# Altium PCB roneMotorBoard-v10.PcbDoc (part 2 of 2)
Units mil, origin at the board's own origin, x right, y up, seen from the top; angles counter-clockwise.
Board outline 3702 x 3936.38 mil, 2 copper layers (Top Layer, Bottom Layer); 100 components, 85 nets, 395 pads, 263 vias.
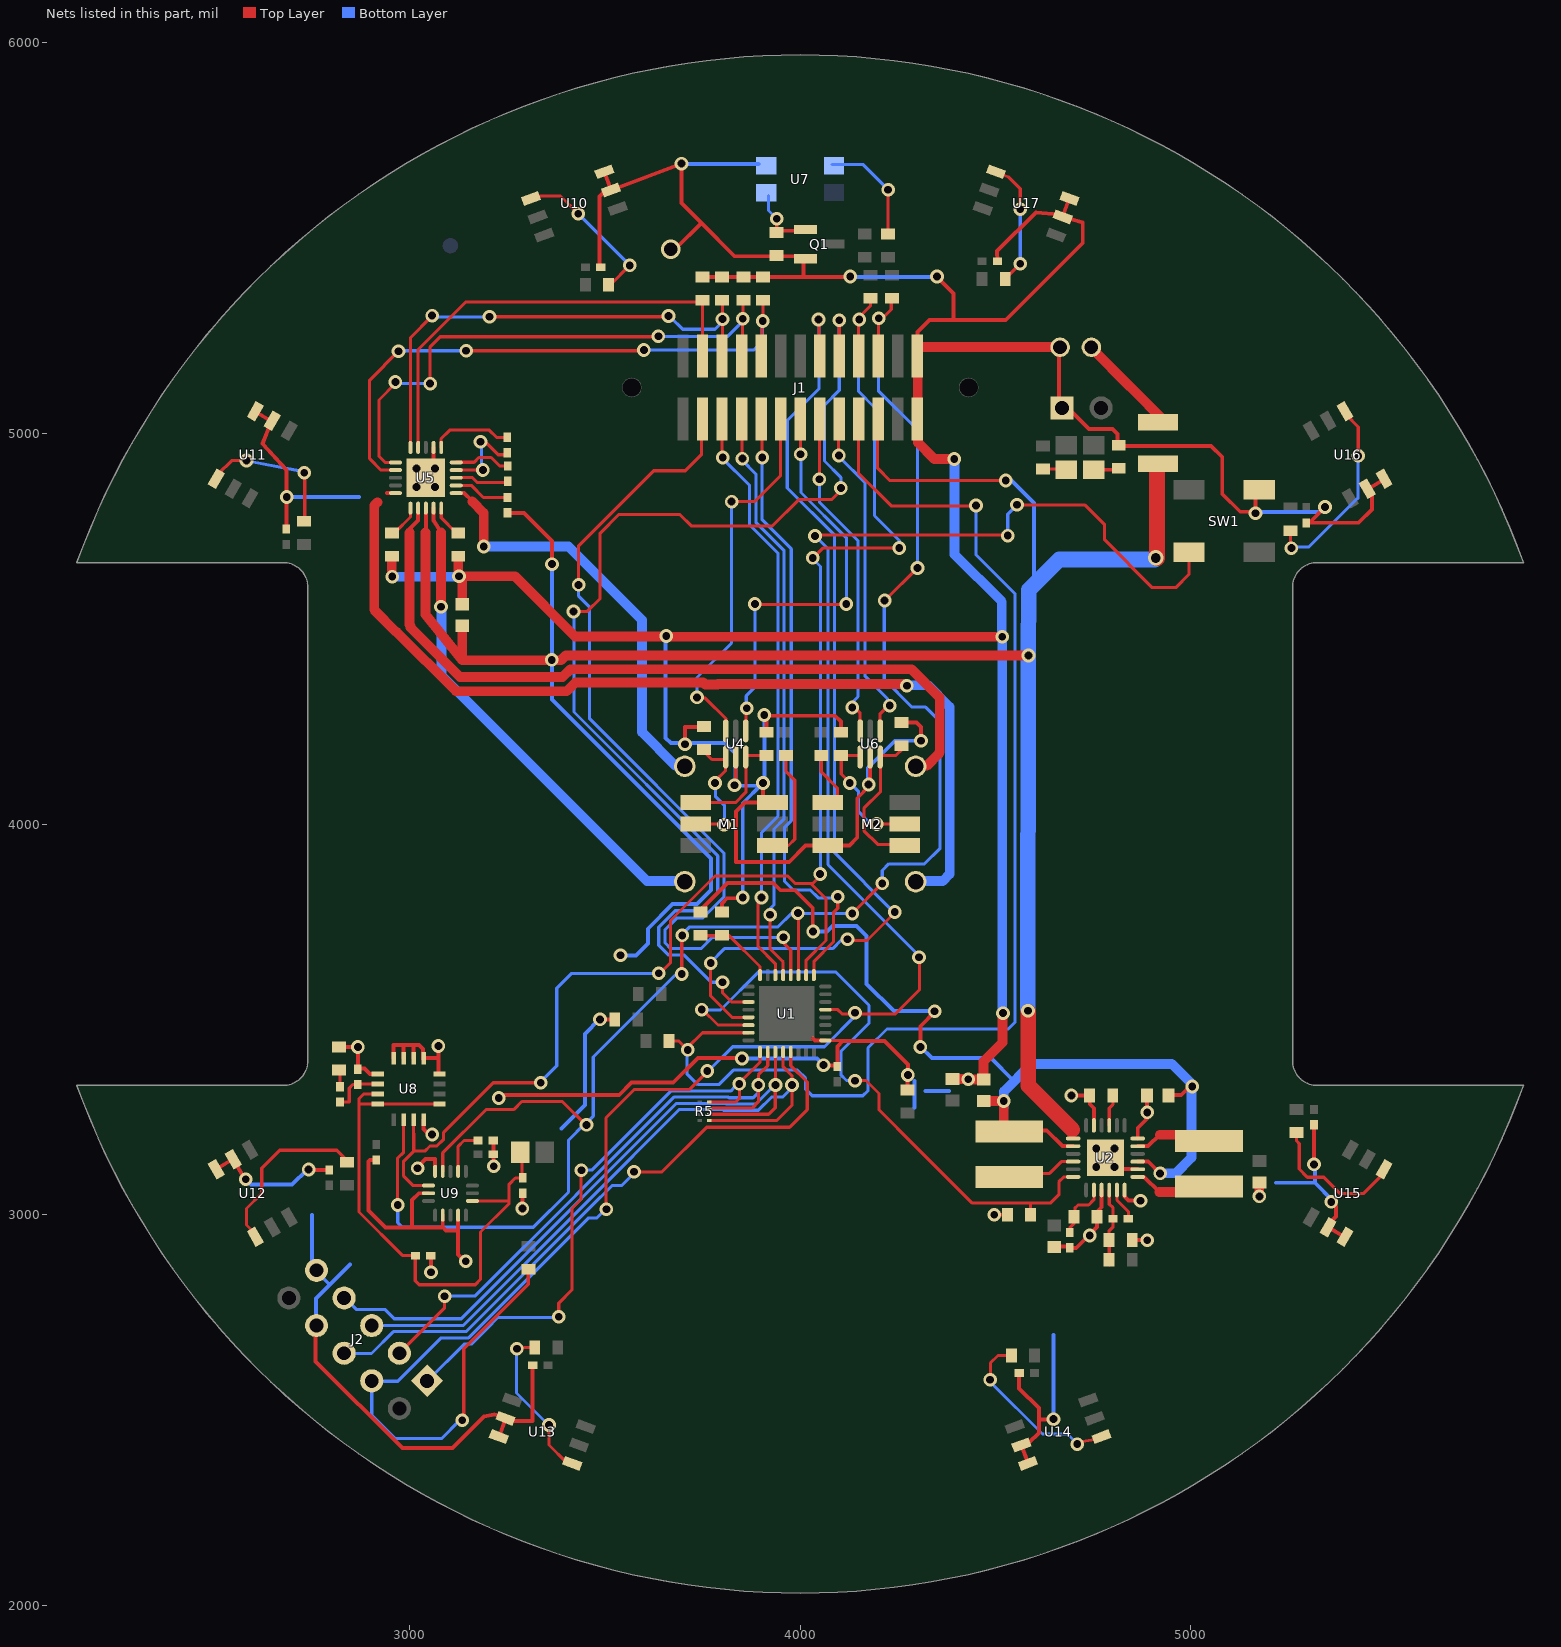
[diagram p2: the nets of this part, all layers, seen from the top]

## Via types
v1: diameter 35, hole 20, Top Layer to Bottom Layer, 233 vias
v2: diameter 25.98, hole 12.99, Top Layer to Bottom Layer, tented top, 9 vias
v3: diameter 35, hole 20, Top Layer to Bottom Layer, tented top, 8 vias
v4: diameter 136, hole 136, Top Layer to Bottom Layer, 4 vias
v5: diameter 96, hole 96, Top Layer to Bottom Layer, 4 vias
v6: diameter 175, hole 175, Top Layer to Bottom Layer, 2 vias
v7: diameter 50, hole 35, Top Layer to Bottom Layer, 1 vias
v8: diameter 40, hole 25, Top Layer to Bottom Layer, 1 vias
v9: diameter 915, hole 915, Top Layer to Bottom Layer, 1 vias

## Nets (pads, with @x,y where several pads share a name; then routed paths per layer and width w, separated by ;. In a path a pad name is that pad's centre, name@x,y a point inside that pad or via, vN(x,y) a via of type N, cw(c..) or ccw(c..) an arc to the next point about the centre after c; other vN are vias at no path point) (continued)
GND: C1.1 C5.1 C6.1 C7.1 C8.1 C9.2 C10.2 C12.1 C13.1 C14.1 C15.1 C16.1 C17.1 C18.1 C19.1 C20.1 C21.2 C23.1 C24.1 C25.1 C26.1 C27.1 J1.25 J1.26 J2.8 J2.9 J3.2 J4.1 M1.K M2.K Q1.2 R6.2 R7.2 R8.2 R9.2 R10.2 R11.2 R12.1 R14.1 R15.2 R17.1 R18.1 R19.1 R21.1 R22.2 R24.2 R26.1 R28.1 R30.1 R39.1 R41.2 SW1.2 U1.1 U2.3 U2.6 U2.8 U2.12 U2.17 U2.25 U4.2 U5.2 U5.21 U6.2 U7.4 U8.4 U8.8 U8.9 U8.10 U8.11 U8.12 U8.13 U9.5 U9.7 U9.10 U9.12 U10.5 U10.6 U11.5 U11.6 U12.5 U12.6 U13.5 U13.6 U14.5 U14.6 U15.5 U15.6 U16.5 U16.6 U17.5 U17.6 | length 18424.4
  Top Layer w8: U1.1@4067.94,3446 4107,3446
  Top Layer w10: U12.6@2505.7,3116.6 2548.38,3142.62 U12.5@2549,3143 ; U12.5@2549,3141.6 2576,3096 v1(2581,3091) ; U11.6@2606,5055 U11.5@2647.91,5030.05 ; U11.5@2643.91,5023.05 2644,5023 2624,4973 2685,4906 v1@2685,4836 ; C14.1@2685,4754.69 v1@2685,4836 ; v1(2686,4837) v1@2685,4836 ; v1(2742,3116) 2739,3116 2738,3115 C15.1@2794,3115 ; J2.8@2760,2715 2760,2625 2982,2403 3110,2403 3191,2484 3217,2489 U13.5@3243,2483 ; R39.1@2819.5,3429.53 v1@2869.03,3429.53 ; C21.2@2868,3372.69 v1@2868,3429 ; C21.2@2868,3374 2885,3374 2898.61,3360.39 U8.13@2919.26,3360.39 ; C23.1@2915,3140.32 2898.68,3140.32 2895,3136.63 2895,3010.87 2938.87,2967 3085,2967 ; U8.12@2959.61,3400.74 2959.61,3434 2985.2,3434 ; U8.11@2985.2,3400.74 2985.2,3434 ; 3007,2968 3007,3038 3024,3055 U9.7@3048.9,3055 ; U8.10@3010.8,3400.74 3010.8,3433.2 ; v1@3022,3123 3041.63,3142.63 3065.63,3142.63 U9.5@3065.63,3111.1 ; U8.9@3035,3399 3035,3424 3025,3434 2985.2,3434 ; U8.4@3036.39,3243.26 3036.39,3219.11 3050,3205.5 v1@3058.5,3205.5 ; U8.9@3036.39,3400.74 3074.5,3400.74 ; v1@3055,2850 v1(3055,2853) C27.1@3055,2895 ; U5.21@3062,4906 U5.2@3062,4964.07 ; U8.8@3074,3360 v1@3074,3428.5 ; 3085.32,2968.68 U9.10@3085.32,2998.9 ; 3086,2968 3094,2960 3124.69,2960 ; U9.12@3124.69,2998.9 3124.69,2960 ; 3125,2960 3124.69,2960 ; v1@3145,2878 3124.69,2898.31 3124.69,2960 ; v1@3214.68,3125.32 C26.1@3214.68,3190 ; v1@3227.5,3297 3237.5,3307 3537,3307 3568,3338 3675,3338 3738,3401 v1@3850,3401 ; U13.6@3231,2434 U13.5@3246.03,2479.2 ; U13.5@3251,2473 3252,2472 3315.32,2472 C16.1@3315.32,2615 ; v1(3289,3016) C24.1@3289,3055 ; v1@3485.5,3500 R30.1@3525.47,3500 ; C13.1@3496,5423 3486,5433 3486,5606 3502.2,5622.2 U10.5@3515.97,5622.2 ; U10.6@3498.87,5669.19 U10.5@3516,5623 ; U10.5@3526,5626 v1(3696,5690) 3696,5589 3747,5538 ; v7@3660,5472 3681,5472 3747,5538 ; v1(3705,4204) 3705,4248 R17.1@3749.47,4248 ; R6.2@3747,5399.53 R6.2@3750,5399.53 R7.2@3800,5399.53 R8.2@3855,5399.53 R9.2@3905,5399.53 4008,5399.53 Q1.2@4008,5441 ; R28.1@3800,3774.53 3800,3797 3813,3810 3841,3810 v1@3853,3822 ; v1@3835,4100 U4.2@3835,4171.54 U4.2@3835,4174.54 ; M1.K@3905,4055 M1.K@3905,4055.12 ; v1(3905,4105) M1.K@3905,4055.12 ; M1.K@3905.16,4055.12 M1.K@3905,4055.12 ; R15.2@3914,4235 v1@3914,4275 ; v1@3917.5,4277 4089,4277 4104,4262 R14.1@4104,4234.53 ; R41.2@3939,5454.47 3940.47,5453 3987,5453 Q1.2@3996,5444 ; R41.2@3940,5453 3832,5453 3747,5538 ; 4008.03,5399.5 v1@4128,5399.5 ; 4033.12,3450.88 4037.9,3446.1 U1.1@4064.43,3446.1 ; v1(4059.5,3383) 4059.5,3390.5 v1@4067,3383 ; v1@4070,3386 4073.5,3382.5 4095,3382.5 4095,3431 4108,3444 ; M2.K@4094.84,3944.88 4125.88,3944.88 4146,3965 4146,4066 v1@4176.5,4096.5 ; M2.K@4096,3945 4014,3945 3972,3903 3836,3903 3836,4031.96 3859.16,4055.12 M1.K@3905,4055.12 ; 4107,3445 4108,3444 ; v1@4179,4101 U6.2@4179,4171.54 ; R12.1@4259,4259.53 4297.47,4259.53 4309,4248 v1(4309,4213) ; R18.1@4275,3319.53 v1@4275,3353 ; v1@4276,3358 4276,3385 4216,3445 4108,3445 4108,3444 ; J1.26@4300,5239 4300,5259 4331,5290 4392,5290 ; v1@4350,5400 4392,5358 4392,5290 ; v1@4427.5,3345 4427.5,3347.56 v1@4427.5,3349.5 ; v1(4496.5,3000) R19.1@4530.47,3000 ; C20.1@4504.69,5440 4504,5466 4603,5565 U17.5@4663,5560 ; C17.1@4560.31,2595 4560.31,2555.68 4611,2505 4611,2476 ; U14.5@4566.03,2410.8 4580.47,2371.44 4581,2370 U14.6@4580,2368 ; U14.5@4573,2417 4586,2417 4611,2442 4611,2476 ; C10.2@4640,2918.44 C7.1@4690,2918.44 ; v1(4648,2477) 4647,2476 4611,2476 ; J3.2@4662,5220 4662,5088 4739,5011 4799,5011 4812,4998 R26.1@4812,4976 ; U17.6@4687,5599 U17.5@4671.97,5553.8 4723,5539 4723,5487 4526,5290 4392,5290 ; C7.1@4690,2917.6 C7.1@4690,2915.32 4706.31,2915.32 4760,2969 R21.1@4760,2988 ; v1@4697,3305 R22.2@4740.47,3305 ; R22.2@4741,3292 4741,3283 4751.47,3272.53 U2.17@4751.47,3228.68 ; U2.25@4751.47,3175.69 U2.25@4781,3146.16 ; R21.1@4759,3007 4771.16,3019.16 U2.3@4771.16,3063.32 ; U2.25@4771.16,3136.32 U2.25@4781,3146.16 ; U2.25@4810.53,3107.47 U2.25@4810.53,3116.63 ; R26.1@4815,4967.53 5051.47,4967.53 5080,4939 5080,4845 5126,4799 5165,4799 SW1.2@5165,4846 ; U2.6@4830.21,3046.79 4840.21,3036.79 v1@4871,3036.79 ; R24.2@4849.53,2935 4889,2935 v1(4888,2935) ; U2.8@4863.68,3116.63 U2.25@4810.53,3116.63 ; U2.12@4863.68,3195.37 4863.68,3221.68 4888,3246 v1@4884,3250 ; v1@4887.44,3261.56 C9.2@4887.44,3315 ; C19.1@5295,4771 5429,4771 5463,4805 5463,4847 U16.5@5460,4850 ; C19.1@5303,4771 v1(5343,4811) ; v1(5315,3129) C18.1@5315,3230.32 ; U15.5@5351,2968.4 U15.6@5394,2943 ; U15.5@5358,2983 5371,2996 5371,3021 v1@5362.5,3029.5 ; v1(5359,3033) v1@5362.5,3029.5 ; v1@5362,3029 v1@5362.5,3029.5 ; v1@5363,3030 v1@5362.5,3029.5 ; U16.5@5454,4858 U16.6@5493,4881 ; U2.25@4781,3146.16 U2.25@4810.53,3116.63
  Top Layer w25: v1@2955,4634 R10.2@2955,4685.47 ; v1@3125,4637 R11.2@3125,4685.47 ; v1@3127.5,4634.5 3128,4634 3270,4634 3424,4480 3657,4479.79 v1(4517,4479) ; C5.1@3135,4562.56 v1@3135,4625 ; J1.26@4301,5193 4301,4976 4343,4934 v1@4393,4934 ; J1.26@4302,5222 4303,5221 J3.2@4653,5221 ; C6.1@4390,3347.56 4427.5,3347.56 v1@4429.56,3347.56 ; v1@4429.94,3346.06 C8.1@4469,3346.06 ; C8.1@4469,3345.5 C8.1@4469,3346.06 ; C8.1@4469.5,3346.06 C8.1@4469,3346.06 ; v1@4518,3516 4518,3441 4469,3392 C8.1@4469,3346.06 ; v1(5175,3047) C12.1@5175,3082.44
  Bottom Layer w10: v1(2581,3091) 2595,3077 2700,3077 2739,3116 v1(2742,3116) ; v1(2686,4837) 2871,4837 ; 2751,3000 2751,2866 2796,2821 ; J2.8@2761,2718 2761,2786 2847.5,2872.5 ; 3389,3221 3449,3281 3449,3463 v1@3486.5,3500.5 ; v1@3655.47,4480.47 3655.47,4220.53 3669,4207 3807,4207 3834,4180 v1@3834,4098 ; v1@3698,5689 U7.4@3894,5689 ; v1@3835,4098 v1@3896,4098 ; v1(3851,3400) 4042.5,3400 v1(4059.5,3383) v1@4059.5,3390.5 ; v1@3853,3822 3853,4053 v1@3902.5,4102.5 ; v1@3909,4103 v1@3909,4272 ; v1@4128,5400 v1@4350,5400 ; v1@4174,4101 4174,4144 4243,4213 v1(4309,4213) ; 4292,3274 4292,3343 ; 4320,3317 4381,3317 ; v1(4648,2477) 4648,2692 ; v1@5163,4798 5330,4798 v1(5343,4811) ; 5217,3082 5317,3082 ; v1@5317,3128 5317,3082 ; v1@5362.5,3036.5 5317,3082
  Bottom Layer w25: v1(2956,4633) v1@3127,4633 ; v1@4395,4929 4395,4690 4516,4569 v1@4516,4482 ; v1@4517,3520 v1(4517,4479)
  other v1: 3144,2881 4741,2947 4871,3036 3021,3119 3216,3124 3058,3205.5 4888,3262 3228.5,3299 4694,3305 4430,3347 4275.5,3357.5 2868,3429.5 3074,3432 3487.5,3500 4519,3516 3853,3812 3832,4099 4175,4101 3908,4279 3657,4481 3127,4634 5165,4795 4394,4934 4128,5401 4350,5401
  other v3: 4757.38,3122.38 4804.62,3122.38 4757.38,3169.62 4804.62,3169.62 3018.38,4862.38 3065.62,4862.38 3018.38,4909.62 3065.62,4909.62
  other v7: 3669,5471
I2C_SCL: J1.22 R1.1 U1.11 U8.2 U9.4 | length 4604.7
  Top Layer w8: v1@2969,3027 2969,3144 2985,3160 ; 2985.2,3160 U8.2@2985.2,3243.26 ; U9.4@3085.32,3111.1 3085.32,3158.44 3195.87,3269 3266.72,3269 3287.72,3290 3391,3290 v1@3451,3230 ; v1@3697,3619 v1@3697,3717 ; U1.11@3995.53,3613.43 v1@3995.53,3771 ; v1(4133,3771) v1(4210,3848) ; J1.22@4200,5197.02 4200,5291 4204,5295 4211.28,5295 4233,5316.72 4233,5334 R1.1@4236,5337 ; v1@4215.5,4570.5 v1@4301,4656
  Bottom Layer w8: v1(2970,3025) 2970,2980 2982,2968 3317,2968 3407,3058 3407,3191 v1@3449,3233 ; v1@3452.5,3234.5 3470.31,3252.31 3470.31,3403.81 3681,3614.5 3685,3614.5 v1@3691.5,3608 ; v1@3697,3717 3716,3736 3942,3736 3978,3772 3992,3772 v1@3994,3770 ; v1@3994,3771 v1(4133,3771) ; v1@4200,5290 4200,5108.5 4300,5008.5 v1@4300,4666 ; v1(4210,3848) 4210,3881 4227,3898 4318,3898 4358,3938 4358,4262 4321,4299 4286,4299 4215,4370 v1@4215,4569
  other v1: 3453,3230 3697,3616 3698,3715 3994,3772 4216,4572 4300,4655 4201,5294
I2C_SDA: J1.20 R2.1 U1.10 U8.3 U9.6 | length 3868.5
  Top Layer w8: 3010.8,3206.8 U8.3@3010.8,3243.26 ; 3011,3180 3011,3163 ; 3011,3181 3011,3208 ; U9.6@3048.9,3074.69 3009.31,3074.69 2985,3099 2985,3137 3011,3163 ; v1(3336,3338) 3214.5,3338 3087.5,3211 3087.5,3193.28 3070.22,3176 3052.5,3176 3039.5,3163 3011,3163 ; v1@3639.5,3616.5 3668,3645 3668,3753 3782,3867 3968.28,3867 3987.78,3847.5 4027.5,3847.5 ; U1.10@4015.21,3613.43 4015.21,3651.21 4066,3702 4066,3809 4027.5,3847.5 ; v1@4032,4680 4058,4706 v1@4254,4706 ; v1@4051,3867 4031.5,3847.5 4027.5,3847.5 ; J1.20@4149,5196.02 v1@4149,5294 ; v1@4150,5296 4180,5326 R2.1@4180,5342
  Bottom Layer w8: v1@3335,3339 3355.5,3359.5 ; 3355.5,3359.54 3377,3381.04 3377,3580 3414,3617 v1@3638,3617 ; v1@4032,4679 4052,4659 v1@4052,3870 ; v1@4149,5287 4149,5107 4190,5066 4190,4789 4254,4725 v1@4254,4706
  other v1: 3638,3618 4051,3872 4032,4681 4253.5,4706.5 4151,5291
JTAG_BOTTOM_TCK: J2.1 R5.4 U1.25 | length 1513.3
  Top Layer w8: v1(3382,2739) 3382,2774 3416,2808 3416,3016 3439,3039 v1@3439,3116 ; R5.4@3766.81,3288.62 3835.62,3288.62 3845,3299 v1@3845,3332 ; v1@3845.5,3338.5 3897.1,3390.1 U1.25@3897.1,3416.57
  Bottom Layer w8: J2.1@3047,2576 3140,2669 3159,2669 3198.13,2708.13 3198.13,2708.63 3226.5,2737 v1@3381,2737 ; v1@3442,3115 3468.12,3115 3670.12,3317 3823,3317 3837,3335 v1@3846,3335
  other v1: 3440,3114 3844,3335
JTAG_BOTTOM_TDI: J2.7 R5.2 U1.27 | length 1692.6
  Top Layer w8: R5.2@3766.81,3257.13 3919.13,3257.13 3936,3274 v1@3936,3332 ; v1@3936.47,3329.47 U1.27@3936.47,3416.57
  Bottom Layer w8: J2.7@2837,2785 2864.05,2757.95 2937.05,2757.95 2961,2734 3132.63,2734 3441.25,3042.63 3441.25,3042.88 3683.37,3285 3809.09,3285 3810.7,3283.39 3886.11,3283.39 3934.72,3332 v1(3937,3332) v1@3937,3333
JTAG_BOTTOM_TDO: J2.5 R5.1 U1.28 | length 1709.6
  Top Layer w8: R5.1@3766.81,3241.38 3940.38,3241.38 3979,3280 3979,3356 3956.16,3378.84 U1.28@3956.16,3416.57
  Bottom Layer w8: J2.5@2904,2717 3138.25,2717 3457.25,3036 3457.25,3036.25 3690,3269 3802.46,3269 3804.07,3267.39 3892.73,3267.39 3926.85,3301.5 3955.63,3301.5 3979,3324.87 v1(3979,3332)
JTAG_BOTTOM_TEST: J2.6 U1.29 | length 1614.6
  Top Layer w8: v1@3570,3109.5 3646,3109.5 3760.5,3224 3973,3224 4018,3269 4018,3339.63 3975.84,3381.78 U1.29@3975.84,3416.57
  Bottom Layer w8: J2.6@2834,2645 2903,2645 2959,2701 3144.88,2701 3462.88,3019 3463,3019 3519,3075 3543.5,3075 3574.5,3106 v1(3574.5,3110)
JTAG_BOTTOM_TMS: J2.3 R5.3 U1.26 | length 1505.7
  Top Layer w8: J2.3@2974,2646 3090,2762 v1(3090,2791.5) ; R5.3@3766.81,3272.87 3876.87,3272.87 3893,3289 3893,3313 ; v1(3893,3332) 3893,3313 ; U1.26@3916.79,3416.57 3916.79,3381.79 3893,3358 3893,3313
  Bottom Layer w8: v1@3088.5,2793 v1(3090,2791.5) 3090,2791.86 3090.57,2792.43 3168.43,2792.43 3425.25,3049.25 3425.25,3049.51 3676.75,3301 3815.71,3301 3817.33,3299.39 3879.39,3299.39 3893,3313
LED_IR_BEACON: J1.16 U1.21 | length 2493.1
  Top Layer w8: v1@3770,3644 3770,3561 3826,3505 U1.21@3865,3505 ; J1.16@4048,5197.02 v1@4048,5288 ; v1@4110,3702 4171,3702 v1@4242.5,3773.5
  Bottom Layer w8: v1@3772,3647 3806,3681 4083,3681 4104,3702 v1@4122,3702 ; v1@4048,5290 4048,5113.5 3967,5032.5 3967,4860 4088,4739 4088,3926 4241,3773 v1@4241,3771
  other v1: 3771,3644 4121,3705 4242,3775 4047,5291
MOT0_CUR: R11.1 U5.15 | length 77.7
  Top Layer w8: U5.15@3081.37,4808.24 3081.37,4783.37 R11.1@3118.74,4746
MOT0_PWMA: J1.4 R6.1 U5.4 | length 1165.6
  Top Layer w8: U5.4@3022.32,4963.76 3022.32,5214.31 3144,5336 R6.1@3746,5336 ; J1.4@3750,5197.02 R6.1@3750,5338
MOT0_PWMB: J1.6 R7.1 U5.5 | length 1263
  Top Layer w8: U5.5@3002.63,4963.76 3002.63,5022.37 ; 3003,5022 3003,5245 v1@3056,5298 ; v1(3205,5298) v1@3665,5298 ; J1.6@3801,5197.02 R7.1@3801,5341
  Bottom Layer w8: v1@3056,5297 v1@3204,5297 ; v1@3667.5,5297.5 3699,5266 3782,5266 v1@3801,5285
  other v1: 3801,5292 3663,5300 3058,5301
MOT1_A: M2.M2 U5.10 | length 2422.6
  Top Layer w10: 2941.94,4846.94 U5.10@2963.56,4846.94
  Top Layer w25: 2918.5,4823.5 2910,4815 2910,4548 2966.15,4491.85 2967,4491.85 3118.85,4340 3402.67,4340 3424.67,4362 3751.74,4362 3756.74,4357 3788.26,4357 3789.26,4358 v1@4270,4358
  Bottom Layer w25: v1@4275,4355 4327,4355 4382.5,4299.5 4382.5,3871.5 4365,3854 M2.M2@4284,3854
  other v1: 4273,4354
MOT1_B: M2.M1 U5.12 | length 1975.9
  Top Layer w10: 3001,4746 3001,4756 3022,4777 U5.12@3022,4807.24
  Top Layer w25: 3001,4746 3000,4745 3000,4510 3002.93,4507.07 3002.93,4502.59 3129.52,4376 3392,4376 3412,4396 4285,4396 4357,4324 4357,4184 4355,4182 4355,4180 4324,4149 4302,4149 M2.M1@4298,4153
MOT1_CUR: R10.1 U5.11 | length 78.8
  Top Layer w8: R10.1@2965.03,4745 2965.03,4748.03 3002.63,4785.63 U5.11@3002.63,4808.24
MOT1_PWMA: J1.8 R8.1 U5.6 | length 1408.4
  Top Layer w8: U5.6@2964.24,4925.37 2937.63,4925.37 2922,4941 2922,5085 v1@2964.5,5127.5 ; v1(3053,5127) 3053,5221 3079,5247 v1@3637,5247 ; J1.8@3852,5201.02 v1@3852,5292 ; v1@3854,5289 R8.1@3854,5342
  Bottom Layer w8: v1@2964,5127 v1(3053,5127) ; v1(3637,5248) 3815,5248 v1@3854.5,5287.5
  other v1: 2964,5131 3853,5293
MOT1_PWMB: J1.10 R9.1 U5.7 | length 1520
  Top Layer w8: U5.7@2964.24,4905.69 2927.32,4905.69 2898,4935 2898,5136 v1@2973,5211 ; v1(3145,5211) v1@3601,5211 ; J1.10@3902,5203.02 v1@3902,5284 ; v1@3905,5280 R9.1@3905,5342.47
  Bottom Layer w8: v1@2975,5211 v1(3145,5211) ; v1(3600,5213) 3881,5213 3903,5235 v1@3903,5288
  other v1: 2972,5210 3904,5287
MOT_0A: M1.M2 U5.16 | length 1089.5
  Top Layer w10: U5.16@3119.07,4846.94 3140.06,4846.94 3161,4826
  Top Layer w25: 3161,4826 3161,4825 3190,4796 v1(3190,4710)
  Bottom Layer w25: v1(3190,4710) 3406.74,4710 3595,4521.74 3595,4235 3680,4150 M1.M2@3701,4150
MOT_0B: M1.M1 U5.14 | length 1277.1
  Top Layer w10: U5.14@3062,4808.56 3062,4776 3081,4746
  Top Layer w25: v1(3081,4556) 3081,4746
  Bottom Layer w25: v1@3082,4557 3082,4380 3608,3854 M1.M1@3706.19,3854
NetC2_1: C2.1 U5.19 | length 218.5
  Top Layer w8: U5.19@3119.07,4906 v1@3185,4906 ; v1@3181,4974 3198,4974 3227,4945 3251.69,4945 C2.1@3253,4946.31
  Bottom Layer w8: v1@3184,4907 v1@3184,4975
  other v1: 3188,4906 3182,4978
NetC2_2: C2.2 U5.1 | length 211.4
  Top Layer w8: U5.1@3080.68,4964.07 3080.68,4985.68 3103,5008 3204.25,5008 3223.25,4989 3248.69,4989 C2.2@3252,4985.69
NetC3_1: C3.1 U5.18 | length 138.2
  Top Layer w8: U5.18@3119.07,4886.31 3161.31,4886.31 3173.63,4874 3248.06,4874 C3.1@3251,4876.94
NetC3_2: C3.2 U5.20 | length 146.3
  Top Layer w8: U5.20@3119.07,4925.68 3165.43,4925.68 3177.75,4938 3209,4938 3230.69,4916.31 C3.2@3251.31,4916.31
NetC4_2: C4.2 U5.17 | length 144.7
  Top Layer w8: U5.17@3119.07,4866.63 3158.37,4866.63 3189.31,4835.69 C4.2@3251,4835.69
NetC7_2: C7.2 R21.2 U2.2 | length 143.4
  Top Layer w8: C7.2@4690,2954.69 4690,2967 4700,2977 R21.2@4700,2994 ; R21.2@4700.47,2995 R21.2@4701.17,2995 ; R21.2@4703,3000 4703,3017 4711,3025 4738,3025 4751.47,3038.47 U2.2@4751.47,3063.32
NetC11_1: C11.1 R23.2 R24.1 U2.4 | length 205.2
  Top Layer w8: R24.1@4790,2941 4790,2958 4800,2968 4800,3019 4791,3027 U2.4@4791,3056 ; U2.4@4790.84,3063.48 4791,3063.32 U2.4@4791,3048.99 ; R23.2@4791,2871 4791,2937 R24.1@4792,2938
NetC11_2: C11.2 U2.5 | length 80.5
  Top Layer w8: U2.5@4810.53,3063.32 4810.53,3037.47 4840,3008 C11.2@4840,2995
NetC22_2: C22.2 R39.2 | length 42.3
  Top Layer w8: C22.2@2822.5,3327.69 R39.2@2822.5,3370
NetC26_2: C26.2 U9.2 | length 121.5
  Top Layer w8: U9.2@3124.69,3111.1 3124.69,3175.19 3139.5,3190 C26.2@3176,3190
NetD1_2: D1.2 R20.2 | length 50.5
  Top Layer w8: R20.2@4621,4908.47 D1.2@4671.53,4908.47
NetD2_2: D2.2 R26.2 | length 60.5
  Top Layer w8: D2.2@4751,4906.5 R26.2@4811.5,4906.5
NetJ3_1: J3.1 R25.2 | length 267.1
  Top Layer w25: J3.1@4745,5218 4844,5119 ; 4845.15,5118 R25.2@4935,5028.15
NetL1_1: L1.1 U2.22 | length 188
  Top Layer w8: L1.1@4521,3097.75 4529.25,3106 4638.37,3106 4668.37,3136 U2.22@4693.11,3136
NetL2_1: L2.1 U2.7 | length 211.7
  Top Layer w10: U2.7@4863.68,3096.94 4880.06,3096.94 4919,3058 ; L2.1@5031.09,3058 L2.1@5051,3077.91
  Top Layer w25: 4919,3058 L2.1@5031.09,3058
NetL2_2: L2.2 U2.11 | length 158.2
  Top Layer w10: U2.11@4863.68,3175.53 4890,3175.53 ; 4890,3176 4920.91,3205 ; L2.2@5039.41,3206 L2.2@5051,3194.41
  Top Layer w25: 4920.91,3205 L2.2@4994,3205
NetM1_A: M1.A R16.1 | length 310.2
  Top Layer w8: M1.A@3906,3945 3970,3945 3986,3961 3986,4112 3964,4134 R16.1@3964,4175.47
NetM2_A: M2.A R13.1 | length 137
  Top Layer w8: 4054,4133 R13.1@4054,4175.47 ; 4055,4132 4095,4092 M2.A@4095,4054
NetQ1_1: Q1.1 R41.1 U7.3 | length 179.7
  Top Layer w8: R41.1@3940,5512 v1(3940,5549) ; R41.1@3940,5518 4010.17,5518 Q1.1@4013.57,5521.4
  Bottom Layer w8: U7.3@3919,5608 3919,5570 v1(3940,5549)
NetR22_1: R22.1 U2.15 | length 83.8
  Top Layer w8: U2.15@4790.84,3228.83 4790.84,3265.84 4790.84,3272.84 4800,3282 4800,3306 R22.1@4802,3308
NetR31_1: R31.1 U10.1 | length 384.5
  Top Layer w8: U10.1@3323,5607 3386.47,5607 v1(3432,5561.47) ; R31.1@3514.53,5380 v1(3564,5429.47)
  Bottom Layer w8: v1(3432,5561.47) v1(3564,5429.47)
NetR32_1: R32.1 U11.1 | length 381.1
  Top Layer w8: U11.1@2511,4896 2545,4930 v1(2583,4930) ; R32.1@2726.03,4778.5 2732,4772.53 v1@2732,4901
  Bottom Layer w8: v1@2580,4935 2579,4935 2579.96,4934.82 2585.78,4929.09 v1@2731.07,4901.37
  other v1: 2731,4899
NetR33_1: R33.1 U12.1 | length 446.8
  Top Layer w8: U12.1@2604,2953 2583,2974 2583,3016 2622,3055 2622,3119 2668,3165 2814,3165 2819,3160 ; 2818,3161 R33.1@2845,3134.53
NetR34_1: R34.1 U13.1 | length 410.6
  Top Layer w8: v1@3275,2651 3284,2660 R34.1@3320.47,2660 ; R34.1@3320,2660 R34.1@3320.47,2660 ; R34.1@3325,2660 R34.1@3320.47,2660 ; v1(3357,2462) 3357,2411 3401,2367 U13.1@3417,2367
  Bottom Layer w8: v1@3277,2653 3274,2650 3274,2544 3356,2462 v1@3356,2461
  other v1: 3275,2657
NetR35_1: R35.1 U14.1 | length 461.9
  Top Layer w8: v1@4487,2586 4487,2621 4506,2640 R35.1@4540.47,2640 ; v1@4710,2413 4714.01,2418.46 U14.1@4770,2427
  Bottom Layer w8: v1@4487,2585 4487,2571 4620,2439 4684,2439 v1@4710,2413
  other v1: 4709,2413 4486,2578
NetR36_1: R36.1 U15.1 | length 371.8
  Top Layer w8: R36.1@5278,3202.47 R36.1@5270,3210.47 5270,3189 5277,3182 5277,3117 5298,3096 5340,3096 5382,3054 5441,3054 5487,3100 U15.1@5487,3109
NetR37_1: R37.1 U16.1 | length 492.4
  Top Layer w8: v1@5255,4708 R37.1@5255,4752.47 ; U16.1@5397,5047 5428,5016 v1(5428,4942)
  Bottom Layer w8: v1@5256,4709 5301.47,4709 5426,4833.53 ; 5427,4833.53 v1@5427,4942
  other v1: 5257,4706
NetR38_1: R38.1 U17.1 | length 318
  Top Layer w8: U17.1@4503,5668 4534,5655 4563,5626 v1(4563,5573) ; R38.1@4524.53,5395 v1(4563,5433.47)
  Bottom Layer w8: v1@4563,5437 v1(4563,5573)
NetR40_2: R40.2 U7.1 | length 282.9
  Top Layer w8: R40.2@4225,5511 v1(4225,5623)
  Bottom Layer w8: U7.1@4081,5688 4160,5688 v1(4225,5623)
PLLFILT: C21.1 C22.1 U8.14 | length 136.1
  Top Layer w8: C22.1@2823,3288.5 2846,3288.5 2846,3324 2855.32,3333.32 C21.1@2868,3333.32 ; C21.1@2867.5,3334.8 U8.14@2919.26,3334.8
POWER_BUTTON: J1.19 R3.1 U1.23 | length 3139.4
  Top Layer w8: R3.1@3664.53,3445 3688.5,3445 v1@3711.5,3422 ; v1@3710,3426 3749.79,3465.79 U1.23@3867.57,3465.79 ; J1.19@4149,4996 4149,4898 4233,4814 v1@4450,4814
  Bottom Layer w8: v1@3710,3421 3710,3361 3738,3333 3792,3333 3829,3370 3993,3370 4014,3349 4014,3321 4030.5,3304.5 4160.5,3304.5 4173.5,3317.5 4173.5,3427 4222,3475.5 4236.37,3475.5 4236.87,3475 4402.63,3475 4403.13,3475.5 4532.5,3475.5 4549.5,3492.5 4549.5,4589.5 4450,4689 v1@4450,4814
  other v1: 3712,3422 4450,4815
POWER_EN: R19.2 U1.22 U2.24 | length 1673.3
  Top Layer w8: v1@3750,3525 3789.53,3485.47 U1.22@3867.57,3485.47 ; v1@4140,3343.5 4168.5,3343.5 4201.5,3310.5 4201.5,3268.5 4293.5,3176.5 4293.5,3176.37 4439.37,3030.5 4641.13,3030.5 4662,3051.37 4662,3084.31 4674.47,3096.79 U2.24@4698.32,3096.79 ; R19.2@4589.53,3000 4589.53,3030.47
  Bottom Layer w8: v1@3752,3524 3796,3524 3893.5,3621.5 4090.22,3621.5 4176,3535.72 4176,3490 4104,3418 4104,3358 4118.5,3343.5 v1@4140,3343.5
  other v1: 4140,3343 3748,3525
QEI_0A: J1.11 U4.6 | length 936.9
  Top Layer w8: v1@3737,4322 3757,4322 3810.41,4268.59 U4.6@3810.41,4241.46 ; v1(3824.5,4825) 3883,4825 3950,4892 J1.11@3950,5013
  Bottom Layer w8: v1(3736,4324) 3736,4375 3824,4463 3824,4780 ; 3824,4777.5 v1@3824,4825
QEI_0A_ANALOG: M1.E1 R17.2 U4.1 | length 335.5
  Top Layer w8: M1.E1@3708.31,4000 v1@3804,4000 ; R17.2@3759,4180 3774,4165 3809,4165 3809,4136 3783,4111 v1@3783,4097
  Bottom Layer w8: v1@3783,4099 3783,4071 3806,4048 v1@3806,4004
  other v1: 3805,3998 3782,4105
QEI_0B: J1.13 U4.4 | length 1103.1
  Top Layer w8: U4.4@3861.59,4241.46 v1@3861.59,4308.41 ; v1@3884,4562 v1@4119,4562 ; v1@4001,4942 J1.13@4001,5031
  Bottom Layer w8: v1@3861,4291 v1@3861,4308 ; v1@3862,4300 3862,4328 3884,4350 v1@3884,4562 ; v1@4002,4941 4002,4848.37 4118,4732.37 v1@4118,4565
  other v1: 3863,4296 3884,4563 4118,4563 4001,4946
QEI_0B_ANALOG: M1.E2 R15.1 U4.3 | length 323.7
  Top Layer w8: M1.E2@3710,4055 3835,4055 3861,4081 3861,4186.13 U4.3@3857.59,4189.54 ; U4.3@3862,4175.47 R15.1@3914,4175.47
QEI_1A: J1.15 U6.6 | length 865.2
  Top Layer w8: v1@4049,4881 J1.15@4049,5048 ; v1@4133,4304 4153.41,4283.59 U6.6@4153.41,4238.46
  Bottom Layer w8: v1@4049,4880 4049,4824 4148,4725 4148,4326 4133,4311 v1@4133,4303
  other v1: 4133,4298 4049,4882
QEI_1A_ANALOG: M2.E1 R14.2 U6.1 | length 359.2
  Top Layer w8: R14.2@4104,4175.47 U6.1@4152.53,4175.47 ; R14.2@4105,4173 4105,4128 v1@4126,4107 ; v1@4207,4000 M2.E1@4285,4000
  Bottom Layer w8: v1@4122,4105 v1(4127,4105) 4149.41,4082.59 4149.41,4031.59 4180,4001 v1@4207,4001
  other v1: 4196,4000
QEI_1B: J1.17 U6.4 | length 904.6
  Top Layer w8: v1@4098,4951 J1.17@4098,5038 ; U6.4@4204.59,4238.46 4204.59,4282.59 v1@4225,4303 ; v1@4225,4303 4232,4310 4232,4313 4225,4306 v1@4225,4303
  Bottom Layer w8: v1@4100,4939 4166,4873 4166,4378 4223,4321 v1@4223,4298 ; v1@4220,4313 v1@4234,4313 ; v1@4225,4303 4225,4306 v1@4232,4313
  other v1: 4229,4303 4099,4943
QEI_1B_ANALOG: M2.E2 R12.2 U6.3 | length 426.3
  Top Layer w8: U6.3@4204,4175.47 4244.47,4175.47 R12.2@4262,4193 ; U6.3@4205,4182.13 4205,4082 4163,4040 4163,3983 4198,3948 M2.E2@4293,3948
RESET: J1.18 U1.19 | length 2906.6
  Top Layer w8: v1(3420,4544) 3455,4544 3488,4577 3488,4744.37 3535.63,4792 3692,4792 3721,4763 3929,4763 3996,4830 4080,4830 v1@4104.5,4854.5 ; v1(3801,3595) 3801,3568 3824.47,3544.53 U1.19@3867.57,3544.53 ; J1.18@4100,5197.02 v1(4100,5289)
  Bottom Layer w8: v1(3420,4544) 3421,4543 3421,4286.54 3789,3918.54 3789,3823.96 3743.04,3778 3680.04,3778 3638,3735.96 3638,3689.37 3662.37,3665 3702,3665 3772,3595 v1(3801,3595) ; v1(4100,5289) 4100,5110 4062,5072 4062,4929 4104,4887 v1@4104,4855
  other v1: 4104,4860
RESET_430: J2.4 R4.1 SW1.3 U1.5 | length 5334.7
  Top Layer w8: v1(3135,2474) 3139,2478 3139,2657 3304,2822 R4.1@3304,2858 ; v1@3503,3017 3503,3248 3576,3321 3717,3321 v1@3762,3366 ; v1@4036,4740 4522,4740 v1@4531,4731 ; U1.5@4064.43,3524.84 4096.16,3524.84 4107,3514 4243.75,3514 4305,3575.25 v1@4305,3660 ; v1(4555,4817) 4555,4816 4729,4816 4779,4766 4779,4727 4901,4605 4961,4605 4995,4639 SW1.3@4995,4695
  Bottom Layer w8: v1(3135,2474) 3129,2474 3082,2427 2964,2427 2903.58,2487.42 2903.58,2568.58 2909,2574 2970,2574 3081,2685 3151.51,2685 3458.51,2992 3480,2992 v1@3503,3015 ; v1@3763.5,3366.5 3827,3430 4062,3430 v1@4145,3513 ; v1@4035.5,4739.5 4071,4704 4071,3896 v1@4303.5,3663.5 ; v1@4531,4731 4531,4793 v1(4555,4817)
  other v1: 3504,3014 3762,3368 4140,3517 4304,3659 4038,4737 4531,4738
SPI_CLK: J1.9 U1.9 | length 1596.2
  Top Layer w8: v1@3902,4938 J1.9@3902,5035.98 ; U1.9@4034.9,3613.43 4034.9,3647.9 4085,3698 4085,3773 4096,3784 v1@4096,3811
  Bottom Layer w8: v1@3902.5,4938 3902.5,4778.5 3977,4704 3977,4008.75 3960,3991.75 3960,3853 3982,3831 4026,3831 4046,3811 v1@4095,3811
  other v1: 4096,3814 3903,4938
SPI_MISO: J1.5 U1.14 | length 1521.3
  Top Layer w8: v1@3800,4936 J1.5@3800,5034.98 ; v1@3901,3807 3892,3798 3892,3687 3936.47,3642.53 U1.14@3936.47,3613.43 U1.14@3936.47,3610
  Bottom Layer w8: v1@3800.91,4935.91 3870.5,4866.31 3870.5,4765.25 3943,4692.75 3943,4021 ; v1@3901,3808 3901,3978 3943,4020
  other v1: 3901,3812 3802,4938
SPI_MOSI: J1.7 U1.13 | length 1498.4
  Top Layer w8: v1@3851,4933 J1.7@3851,5035.98 ; v1@3923,3769 3923,3680.25 3952.13,3651.13 ; 3952.63,3650.63 3952.13,3651.13 ; U1.13@3956.16,3610 U1.13@3956.16,3613.43 3956.16,3647.1 3952.13,3651.13
  Bottom Layer w8: v1@3851.5,4930.5 3886.5,4895.5 3886.5,4771.87 3959,4699.37 3959,4172 ; v1@3923,3767 3923,3783 3933,3793 3933,3987.37 3959,4013.37 3959,4171
  other v1: 3923,3768 3852,4935
SPI_SEL_MSP430: J1.3 U1.12 | length 2195.8
  Top Layer w8: v1(3433,4612) 3433,4712 3625,4904 3706,4904 3747,4945 J1.3@3747,5031.98 ; v1@3959,3710 3959,3694 3975.84,3677.16 U1.12@3975.84,3613.43
  Bottom Layer w8: v1@3433,4613 3433,4583 3461,4555 3461,4269.17 3805,3925.17 3805,3814 3750,3759 3683.67,3759 3654,3729.33 3654,3696 3669,3681 3746,3681 3775,3710 v1@3958,3710
  other v1: 3957,3710
VBAT: C4.1 C5.2 J1.21 R25.1 U2.19 U5.13 | length 6253.2
  Top Layer w8: J1.21@4198,5036.98 4198,4910 4229,4879 v1(4526,4879)
  Top Layer w10: 3042,4749 U5.13@3042,4808.24 U5.13@3042,4809 ; C4.1@3251,4796 3293,4796 3365,4724 v1(3365,4665)
  Top Layer w25: 3041,4746 3041,4536 3135,4419 ; C5.2@3135,4507.44 3135,4419 ; v1(4584,4431) 3400,4431 3388,4419 3135,4419
  Top Layer w40: v1@4584,3520 4584,3330 4696,3218 ; v8@4913,4680 R25.1@4913,4906
  Bottom Layer w10: v1(3365,4665) 3365,4318.5 3772,3911.5 3772,3831 3736,3795 3673,3795 3610,3732 3610,3694.5 3579.5,3664 v1(3540,3664) ; v1@4523,4879 4540.96,4879 4598,4821.96 4598,4628
  Bottom Layer w40: v1@4582,3526 v1(4584,4431) 4585,4599 4663,4677 v8@4907,4677
  other v1: 4583,3522 3364,4420
  other v8: 4910,4681
"VBAT +300": C8.2 C9.1 L1.2 R27.2 U2.9 U2.20 | length 2526.3
  Top Layer w10: R27.2@3745,3774.53 3745,3780 3814,3849 ; 3816,3849 3931,3849 3949.5,3830.5 3986.5,3830.5 4032,3785 v1@4032,3726 ; v1(4307.5,3429.5) 4307.5,3482.5 v1@4345,3520 ; C8.2@4478.5,3291.5 C8.2@4478.75,3291.75 ; L1.2@4581,3215.69 L1.2@4611.31,3215.69 ; L1.2@4611.63,3216 4631,3216 4671,3176 U2.20@4698.32,3176 ; U2.9@4863.68,3136.32 4890.68,3136.32 v1(4921,3106) ; C9.1@4942.56,3315 4951.56,3306 4975,3306 v1@5001,3332
  Top Layer w25: C8.2@4469.5,3290.94 v1@4522.44,3290.94 ; L1.2@4521,3214.25 v1(4521,3291)
  Bottom Layer w10: v1(4033,3725) 4069,3725 4083,3739 4144,3739 4170,3713 4170,3590.87 4239.87,3521 v1(4344,3521) ; v1(4307.5,3429.5) 4308.5,3429.5 4337,3401 4488,3401 4546,3343
  Bottom Layer w25: v1@4521,3276 4521,3316 4591,3386 4951,3386 5001,3336 5001,3146 4961,3106 v1(4921,3106)
  other v1: 5003.44,3328.44
VBAT_SENSE: R27.1 R28.2 U1.16 | length 203.6
  Top Layer w8: R27.1@3748,3714 3818.37,3714 3897.1,3635.27 U1.16@3897.1,3613.43
VDDA: C24.2 C27.2 L3.1 U8.5 U8.15 U8.16 U9.14 | length 1429.2
  Top Layer w8: 2875.39,3283.61 U8.16@2919.26,3283.61 U8.5@3077.5,3283.61 ; U8.15@2919.26,3309.2 2883.2,3309.2 2871,3297 2871,3007 2982,2896 C27.2@3013.68,2896 ; C27.2@3015,2890 3015,2831 3025,2821 3168.37,2821 3182,2834.63 3182,2956 3255,3029 3255,3078 3271,3094 C24.2@3289,3094 ; U9.14@3161.1,3035.32 3255,3035.32 ; C24.2@3288,3104.68 3288,3153 L3.1@3290,3155
pads on no net: J1.c1 J1.c2 J2.10 M1.NC M2.NC SW1.1 SW1.4 U1.4 U1.8 U1.17 U1.18 U1.20 U1.31 U1.32 U1.33 U2.18 U5.8 U5.9 U8.6 U8.7 U9.3 U9.8 U9.9 U9.11 U9.13 U9.15 U9.16 U10.4 U11.4 U12.4 U13.4 U14.4 U15.4 U16.4 U17.4
copper on no net: | length 14570.9
  Top Layer w8: 3076.74,3283.61 3077.13,3284 ; 3976,3611 3976,3613.43
  Top Layer w10: 2676,3331 ccw(c2676,3394) 2739,3394 ; 2677,3331 2149,3331 ccw(c4000,4000) 5851,3331.01 5323,3331 cw(c5323,3394) 5260,3394 5260,4606 cw(c5323,4606) 5323,4669 5851,4669 ccw(c4000,4000) 2149,4669 2677,4669 cw(c2677,4606) 2740,4606 2740,3394
  other v2: 3918.76,3467.76 3966,3467.76 4013.24,3467.76 3918.76,3515 3966,3515 4013.24,3515 3918.76,3562.24 3966,3562.24 4013.24,3562.24
  other v4: 3255,3492 4745,3492 3255,4508 4745,4508
  other v5: 2907,3646 5093,3646 2907,4354 5093,4354
  other v6: 3550,2740 4450,2740
  other v9: 4000,2740

## Polygon pours and split planes (outlines as drawn)
GND on Bottom Layer "Bottom Layer-gnd" (solid, pour order 1000): 3079,3541 2844,3542 2761,3455 2759,3330 2689,3260 2688.1,3023.63 2877,2829 3206,2830 3405,3027 3405,3216
GND on Bottom Layer "MotorGnd" (solid, pour order 1000): 2933,5072 2934,5073 3321,5073 3321,4665 3118,4462 2859,4462 2859,5000
GND on Bottom Layer "Bottom Layer-gnd" (solid, pour order 1000): 4320,3413 5068,3413 5234,3249 5234,3055 5023,2806 4648,2673 4320,2670 4320,3137 4222,3222 4222,3334

## Keep-outs
Mechanical 1:
  circle w5: c3255,4508 r135
  circle w5: c4745,4508 r135
  circle w5: c4745,3492 r135
  circle w5: c3255,3492 r135

## Other copper
Top Layer:
  region net MOT1_CUR: 2972,4750 3006,4784 2999,4788 2938,4758
  region net MOT0_CUR: 3107,4752 3078,4782 3085,4786 3142,4758 3114,4755
  region net "VBAT +300": 4673,3181 4633,3221 4618,3221 4618,3185 4643,3185 4668,3172
  region net NetL1_1: 4670,3133 4667,3140 4642,3125 4618,3125 4618,3102 4639,3103
  region net NetL2_1: 4877,3093 4910,3049 4920,3050 4918,3070 4883,3100
  region net "VBAT +300": 4885,3134 4909,3099 4931,3098 4929,3122 4891,3141
  region net NetL2_2: 4889,3180 4913,3215 4935,3216 4933,3192 4890,3171
  region net VBAT: 4681,3195 4716,3195 4716,3219 4681,3217.97
  region net 3.3V: 4884,3156 4916.66,3168 4925.66,3168 4925.66,3144 4919,3144
  region net 5VUSB: 4689.32,3156 4643,3168 4626,3168 4626,3144 4644,3144
  region net MOT1_A: 2929,4817 2934,4821 2945,4842 2945,4852 2937,4852 2912,4835
  region net MOT_0A: 3153,4817 3148,4821 3137,4842 3137,4852 3145,4852 3170,4835
  region net MOT_0B: 3069,4747 3057,4775.5 3066,4779 3093,4753 3093,4747
  region net MOT1_B: 3013,4746 3025.5,4774 3016,4778 2989,4752 2989,4746
  region net VBAT: 3053.5,4745.5 3053.5,4750 3047,4774 3037,4774 3028.5,4750.5 3028.5,4745.5

## Silkscreen, mask and mechanical layers (free items; w line width, h text height)
Top Overlay:
  circle w10: c3587,3758 r50
  circle w10: c4391,3625 r50
  region: 2458,4204 2308,4054 2408,4054 2408,3854 2508,3854 2508,4054 2608,4054
  text "Motor" at 3202,5092 h45
  text "Driver" at 3120,5031 h45
  text "+" at 3566,3729 h45
  text "+" at 4369,3598 h45
Bottom Overlay:
  text "BUMP0" at 3187,5383 h45
Mechanical 1:
  circle w1: c4000,4000 r1550
  lines w3: 2059,4000 5896,4000 ; 4000,2000 4000,6000

## Text inside footprints (layer, text, board x,y; h text height)
J2: Top Overlay "10" at 2663.16,2843.7 h50 r135; Top Overlay "9" at 2733.87,2914.41 h50 r135; Top Overlay "1" at 3115.71,2532.57 h50 r135; Top Overlay "2" at 3054,2451 h50 r135